# Altium PCB PCB1.PcbDoc
Units mm, origin at the board's own origin, x right, y up, seen from the top; angles counter-clockwise.
Board outline 50.04 x 100.33 mm, 2 copper layers (Top Layer, Bottom Layer); 9 components, 10 nets, 32 pads, 0 vias.
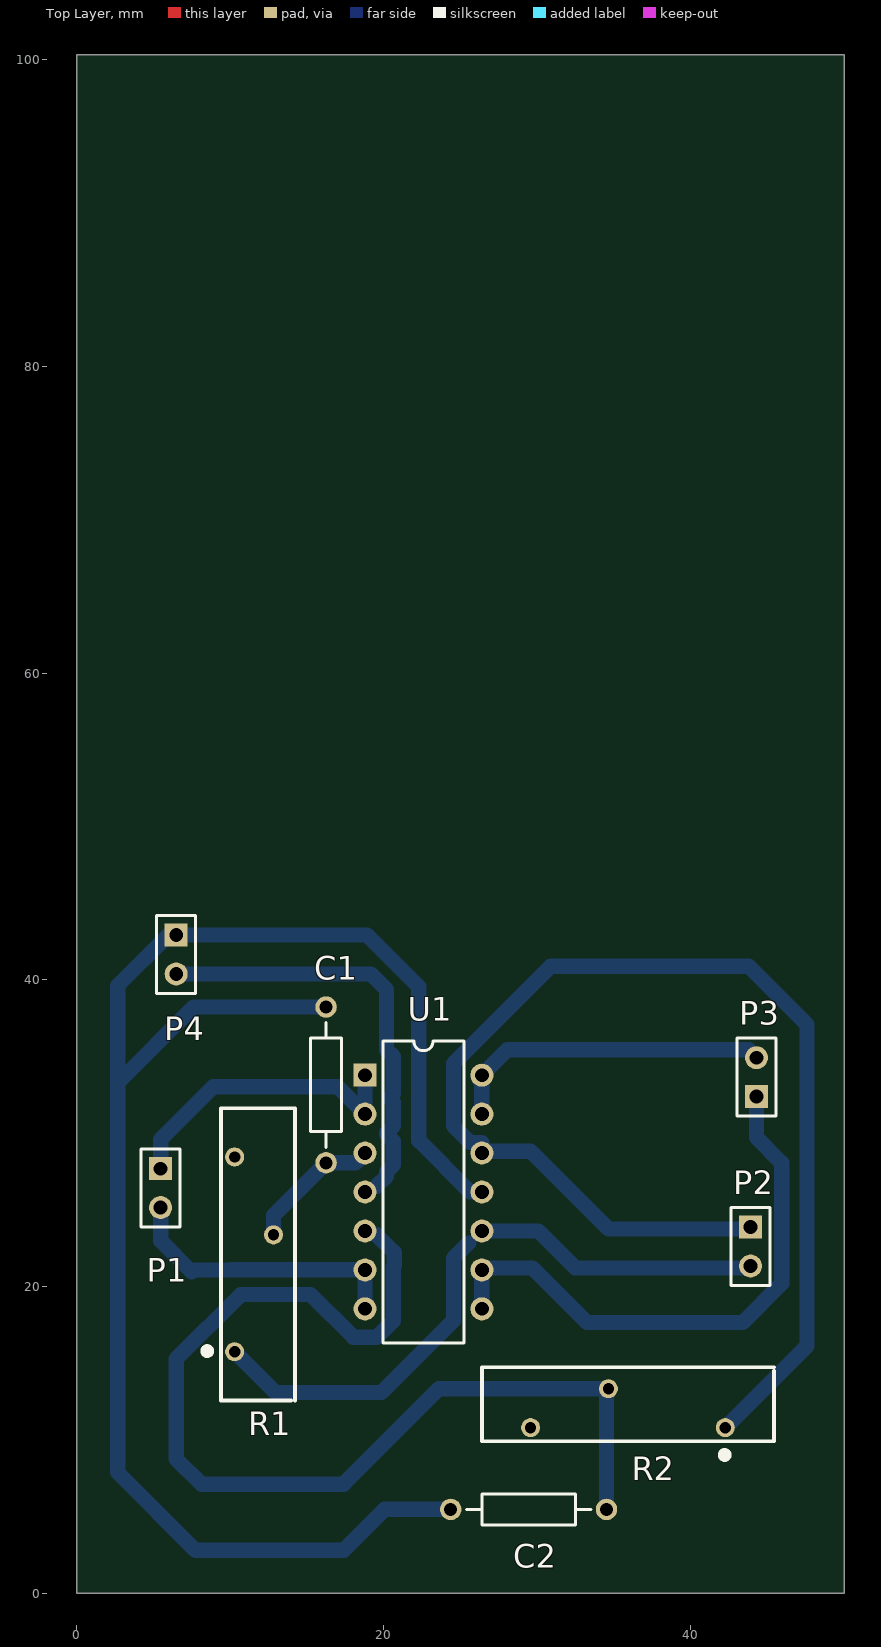
[diagram p0: Top Layer view]
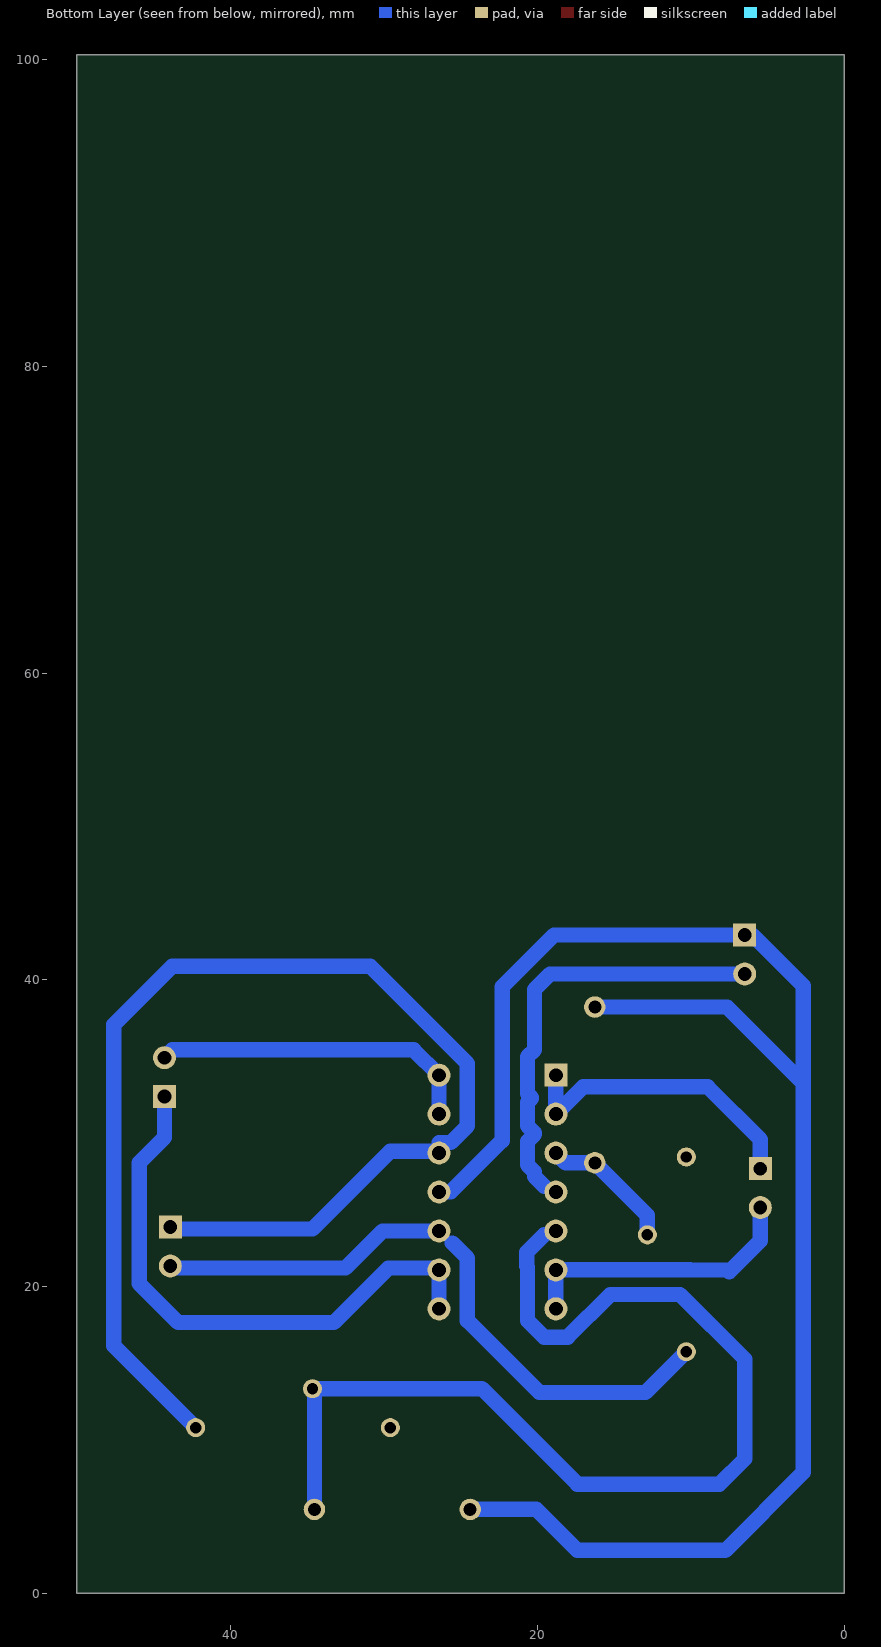
[diagram p1: Bottom Layer view, seen from below]

## Layer stack, top to bottom
Top Solder: solder mask 0.0102, Solder Resist, Dk 3.5
Top Layer: signal copper 0.0356
Dielectric 1: dielectric 0.32, FR-4, Dk 4.8
Bottom Layer: signal copper 0.0356
Bottom Solder: solder mask 0.0102, Solder Resist, Dk 3.5

## Board outline
0,0 0,100.33 50.038,100.33 50.038,0

## Design rules (kind name [scope] priority, off if disabled: settings)
Clearance [All] p1: gap=0.6 ignorepadtopadclearanceinfootprint=FALSE except(0: Arc-Hole Track-Hole SMDPad-Hole THPad-Hole Via-Hole Fill-Hole Poly-Hole Region-Hole Text-Hole; 0.2: Arc-Text Track-Text SMDPad-Text THPad-Text Via-Text Fill-Text Poly-Text Region-Text Text-Text)
PolygonConnect [All] p1: connectstyle=Relief reliefconductorwidth=0.254 reliefentries=4 polygonreliefangle="90 Angle" airgapwidth=0.254
RoutingLayers [All] p1: top layer_v5=FALSE bottom layer_v5=TRUE
RoutingVias [All] p1: holewidth=0.711 width=1.27 viastyle="Through Hole" minholewidth=0.711 minwidth=1.27 maxholewidth=0.711 maxwidth=1.27
SolderMaskExpansion [All] p1: expansion=0.102
Width [All] p1: maxlimit=1.5 minlimit=0.254 preferedwidth=1 toplayer_maxwidth=0.254 toplayer_prefwidth=0.254 bottomlayer_minwidth=0.6 minimp=50.000000 maximp=50.000000 favimp=50.000000
29 further rules are at their usual default settings.

## Components (designator, comment, footprint, x,y, rotation, side; value= is the part's Value field where it differs from the comment)
C1 "Cap Pol1" AXIAL-0.4 16.256,33.147 r90 top value=10uF
C2 "Cap Pol1" AXIAL-0.4 29.464,5.461 r180 top value=10uF
P1 "Header 2" HDR1X2 5.461,27.686 r270 top
P2 "Header 2" HDR1X2 43.942,23.876 r270 top
P3 "Header 2" HDR1X2 44.323,32.385 r90 top
P4 "Header 2" HDR1X2 6.477,42.926 r270 top
R1 "3006P-1-501LF" 3006P_1 14.227,12.573 r90 top
R2 "3006P-1-501LF" 3006P_1 45.466,14.735 r180 top
U1 "LM348N" 646-06 22.606,26.162 r270 top

## Footprints (in the part's own frame and the unit in brackets; to place one, negate y for a bottom-side part, rotate by r counter-clockwise, add the part's x,y. Pads: shape width x height; smd on the part's side, far side on the other; paste and mask are expansions set on the pad)
646-06 [mm] "DIP; 14 Leads; Row Spacing 7.62 mm; Pitch 2.54 mm"
  rect 1.5x1.5 hole 0.9: 1(-7.62,-3.81)
  round 1.5 hole 0.9: 2(-5.08,-3.81) 3(-2.54,-3.81) 4(0,-3.81) 5(2.54,-3.81) 6(5.08,-3.81) 7(7.62,-3.81) 8(7.62,3.81) 9(5.08,3.81) 10(2.54,3.81) 11(0,3.81) 12(-2.54,3.81) 13(-5.08,3.81) 14(-7.62,3.81)
  silkscreen extent -9.85,-2.65 9.85,2.65
3006P_1 [mm]
  round 1.24 hole 0.74: 1(3.175,3.94) 2(10.795,1.4) 3(15.875,3.94)
  silkscreen extent 0,0 19.05,5.92
AXIAL-0.4 [mm] "Axial Device, Thru-Hole; 2 Leads; 0.4 in Pin Spacing"
  round 1.4 hole 0.85: 1(-5.08,0) 2(5.08,0)
  silkscreen extent -4.06,-1.02 4.06,1.02
HDR1X2 [mm] "Connector; Header; 2 Position"
  rect 1.5x1.5 hole 0.9: 1(0,0)
  round 1.5 hole 0.9: 2(2.54,0)
  silkscreen extent -1.27,-1.27 3.81,1.27

## Part data
C1 C2: "Polarized Capacitor (Radial)", LatestRevisionDate=17-Jul-2002, LatestRevisionNote="Re-released for DXP Platform.", PackageDescription="Polarized Capacitor (Radial); 2 Leads", PackageReference=RB7.6-15, Published=8-Jun-2000, Publisher="Altium Limited"
P1 P2 P3 P4: "Header, 2-Pin", LatestRevisionDate=17-Jul-2002, LatestRevisionNote="Re-released for DXP Platform.", Publisher="Altium Limited"
R1 R2: "BOURNS - 3006P-1-501LF - TRIMMER, 15 TURN 500R", Manufacturer_Name=Bourns, Mouser Part Number=652-3006P-1-501-LF, RS Part Number=5219120, Allied_Number=70153562, Allied Price/Stock=https://www.alliedelec.com/bourns-3006p-1-501lf/70153562/, Datasheet Link=https://www.bourns.com/docs/Product-Datasheets/3006.pdf, Manufacturer_Part_Number=3006P-1-501LF, Mouser Price/Stock=https://www.mouser.com/Search/Refine.aspx?Keyword=652-3006P-1-501-LF, RS Price/Stock=http://uk.rs-online.com/web/p/products/5219120
U1: "Quad General-Purpose Operational Amplifier", ComponentLink1Description="Manufacturer Link", ComponentLink1URL=http://www.onsemi.com/site/products/parametrics/0,4446,251,00.html, DatasheetVersion=1988, LatestRevisionDate=06-Jun-2005, LatestRevisionNote="Stylized 3D Model Added.", PackageDescription="DIP; 14 Leads; Row Spacing 7.62 mm; Pitch 2.54 mm", PackageReference=646-06, PackageVersion=1997, Published=17-Jul-2002, Publisher="Altium Limited"

## Nets (pads, with @x,y where several pads share a name; then routed paths per layer and width w, separated by ;. In a path a pad name is that pad's centre, name@x,y a point inside that pad or via, vN(x,y) a via of type N, cw(c..) or ccw(c..) an arc to the next point about the centre after c; other vN are vias at no path point)
5VDC: P4.2 U1.4 | length 28.2
  Bottom Layer w1: P4.2 19.177,40.386 20.193,39.37 20.193,35.441 20.646,34.988 20.646,32.576 20.396,32.326 20.396,32.258 20.646,32.008 20.646,30.476 20.193,30.023 20.193,29.921 20.646,29.468 20.646,27.936 20.193,27.483 20.193,27.178 19.558,26.543
CosIn: P2.1 R2.1 U1.12 | length 82.6
  Bottom Layer w1: R2.1 47.625,16.129 47.625,37.084 43.815,40.894 30.912,40.894 24.566,34.548 24.566,30.476 25.65,29.392 26.416,29.392 U1.12 26.543,28.829 29.591,28.829 34.671,23.749 43.815,23.749 P2.1
CosOut1: P1.2 U1.6 U1.7 | length 18.9
  Bottom Layer w1: P1.2 5.461,22.987 7.493,20.955 7.618,21.08 10.035,21.08 10.037,21.082 U1.6 U1.7
CosOut2: P3.2 U1.13 U1.14 | length 21.3
  Bottom Layer w1: U1.13 U1.14 28.067,35.433 43.815,35.433 P3.2
GND: C1.2 C2.2 P4.1 U1.11 | length 110.3
  Bottom Layer w1: C1.2 7.62,38.227 2.667,33.274 ; C2.2 20.066,5.461 17.399,2.794 7.747,2.794 2.667,7.874 2.667,33.274 ; U1.11 25.654,26.162 22.301,29.515 22.301,39.548 18.923,42.926 P4.1 5.969,42.926 2.667,39.624 2.667,33.274
NetC1_1: C1.1 R1.2 U1.3 | length 8.9
  Bottom Layer w1: R1.2 12.827,24.638 C1.1 18.161,28.067 U1.3
NetC2_1: C2.1 R2.2 U1.5 | length 69
  Bottom Layer w1: 19.558,23.368 20.701,22.225 20.701,21.336 20.646,21.281 20.646,17.776 19.562,16.692 18.03,16.692 15.24,19.482 10.7,19.482 6.477,15.259 6.477,8.763 8.128,7.112 17.399,7.112 23.622,13.335 R2.2 34.544,13.208 C2.1@34.544,5.969
SinIn: P2.2 R1.1 U1.10 | length 41.4
  Bottom Layer w1: R1.1 12.954,13.081 19.871,13.081 24.566,17.776 24.566,21.848 25.552,22.835 ; U1.10 30.099,23.622 32.512,21.209 43.815,21.209 P2.2
SinOut1: P1.1 U1.1 U1.2 | length 19.9
  Bottom Layer w1: P1.1 5.461,29.591 8.89,33.02 17.018,33.02 U1.2 U1.1
SinOut2: P3.1 U1.8 U1.9 | length 37.6
  Bottom Layer w1: U1.8 U1.9 26.543,21.209 29.718,21.209 33.274,17.653 43.434,17.653 45.974,20.193 45.974,28.067 44.323,29.718 P3.1
pads on no net: R1.3 R2.3